# Altium PCB srf05.PcbDoc
Units mil, origin at the board's own origin, x right, y up, seen from the top; angles counter-clockwise.
Board outline 1200 x 760 mil, 2 copper layers (Top Layer, Bottom Layer); 2 components, 0 nets, 19 pads, 0 vias.
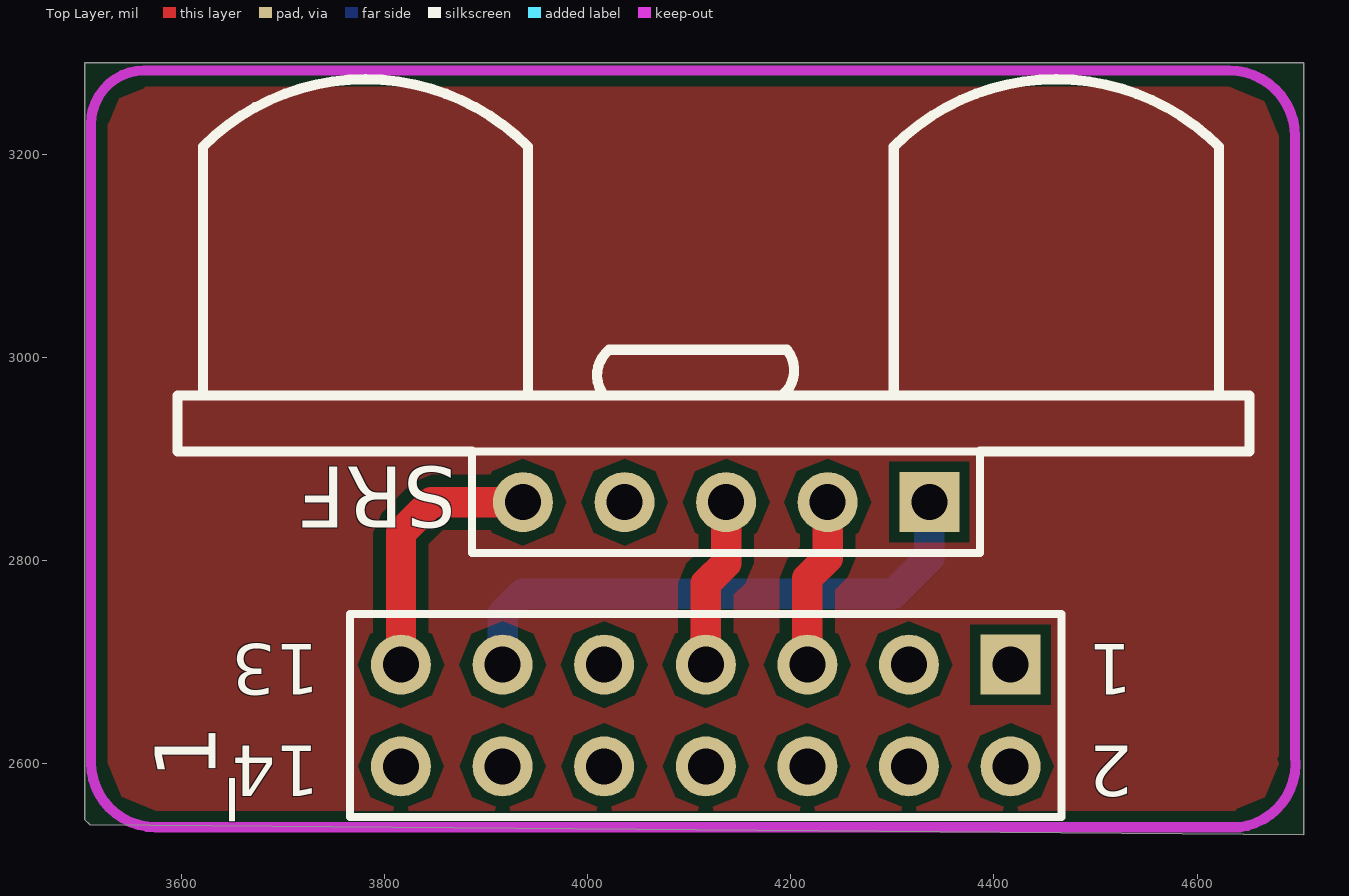
[diagram p0: Top Layer view]
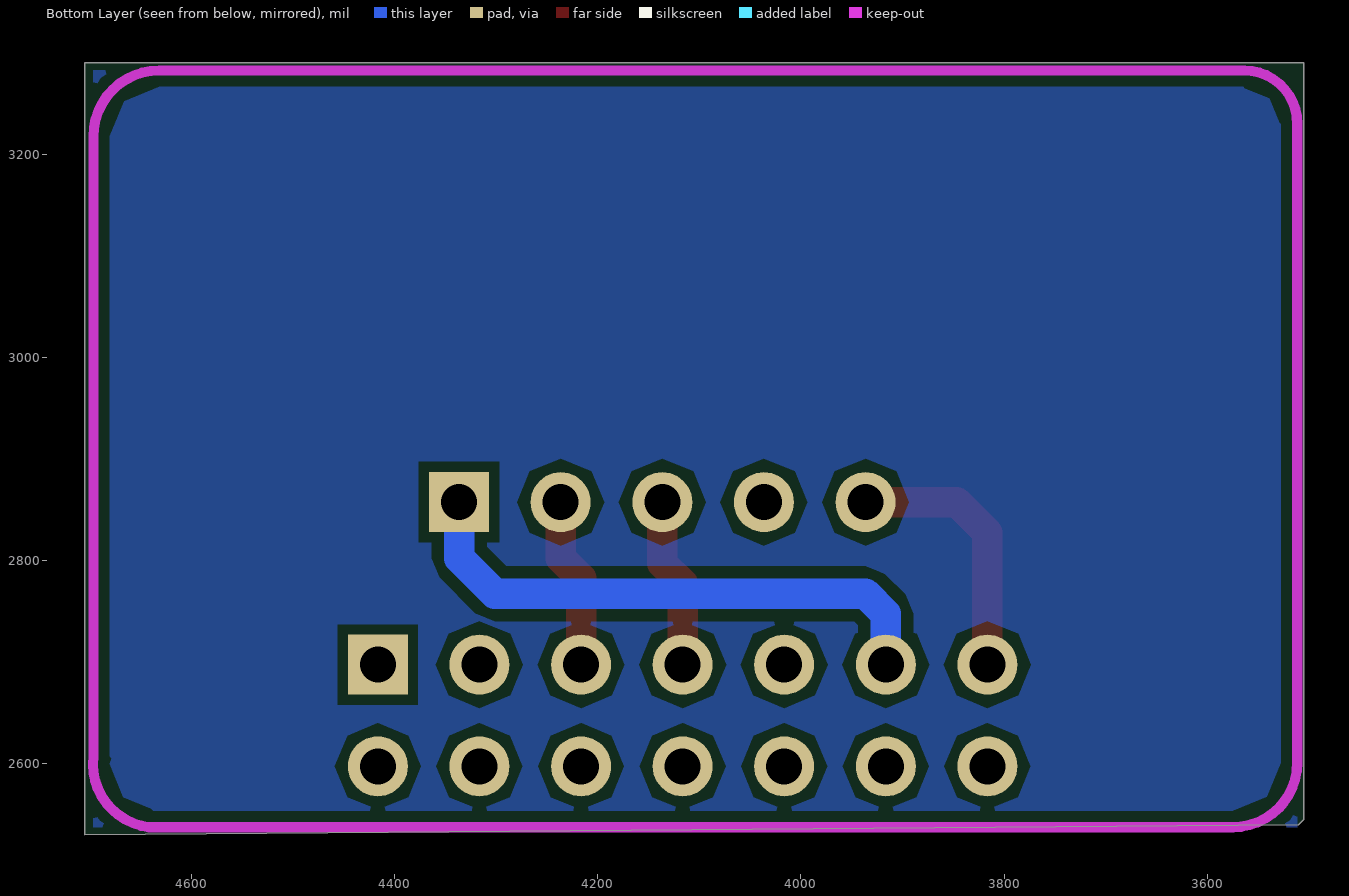
[diagram p1: Bottom Layer view, seen from below]

## Layer stack, top to bottom
Top Layer: signal copper 1.4
Dielectric: dielectric 12.6, FR-4, Dk 4.8
Bottom Layer: signal copper 1.4

## Board outline
3510,2540 3505,2545 3505,3290 4705,3290 4705,3200 4705,2530

## Design rules (kind name [scope] priority, off if disabled: settings)
Clearance [All] p1: gap=10
PolygonConnect [All] p1: connectstyle=Relief reliefconductorwidth=10 reliefentries=4 polygonreliefangle="90 Angle"
RoutingVias [All] p1: holewidth=28 width=50 viastyle="Through Hole" minholewidth=28 minwidth=50 maxholewidth=28 maxwidth=50
SilkscreenOverComponentPads [All] p1: minsilkscreentomaskgap=10
SolderMaskExpansion [All] p1: expansion=4
Width [All] p1: maxlimit=10 minlimit=10 preferedwidth=10
27 further rules are at their usual default settings.

## Components (designator, comment, footprint, x,y, rotation, side; value= is the part's Value field where it differs from the comment)
_1 "" HDR2X7 4416.4,2697.39 r180 top
SRF "" HDR1X5 4336.4,2857.39 r180 top

## Footprints (in the part's own frame and the unit in brackets; to place one, negate y for a bottom-side part, rotate by r counter-clockwise, add the part's x,y. Pads: shape width x height; smd on the part's side, far side on the other; paste and mask are expansions set on the pad)
HDR1X5 [mm] "Connector; Header; 5 Position"
  rect 1.5x1.5 hole 0.9: 1(0,0)
  round 1.5 hole 0.9: 2(2.54,0) 3(5.08,0) 4(7.62,0) 5(10.16,0)
  silkscreen extent -1.27,-1.27 11.43,1.27
HDR2X7 [mm] "Connector; Header; 7x2 Position"
  rect 1.5x1.5 hole 0.9: 1(0,0)
  round 1.5 hole 0.9: 2(0,2.54) 3(2.54,0) 4(2.54,2.54) 5(5.08,0) 6(5.08,2.54) 7(7.62,0) 8(7.62,2.54) 9(10.16,0) 10(10.16,2.54) 11(12.7,0) 12(12.7,2.54) 13(15.24,0) 14(15.24,2.54)
  silkscreen extent -1.27,-1.27 16.51,3.81

## Part data
_1: library part "Header 7X2", "Header, 7-Pin, Dual row"
SRF: library part "Header 5", "Header, 5-Pin"

## Nets (pads, with @x,y where several pads share a name; then routed paths per layer and width w, separated by ;. In a path a pad name is that pad's centre, name@x,y a point inside that pad or via, vN(x,y) a via of type N, cw(c..) or ccw(c..) an arc to the next point about the centre after c; other vN are vias at no path point)
pads on no net: _1.1 _1.2 _1.3 _1.4 _1.5 _1.6 _1.7 _1.8 _1.9 _1.10 _1.11 _1.12 _1.13 _1.14 SRF.1 SRF.2 SRF.3 SRF.4 SRF.5
copper on no net: | length 1146.8
  Top Layer w30: 3816.4,2697.39 3816.4,2827.39 3846.4,2857.39 3936.4,2857.39 ; 4116.4,2697.39 4116.4,2777.39 4136.4,2797.39 4136.4,2857.39 ; 4216.4,2697.39 4216.4,2782.39 4236.4,2802.39 4236.4,2857.39
  Bottom Layer w30: 3916.4,2697.39 3916.4,2747.39 3936.4,2767.39 4301.4,2767.39 4336.4,2802.39 4336.4,2857.39

## Polygon pours and split planes (outlines as drawn)
no net on Top Layer "Top Layer-No Net" (solid, pour order 1000): 4689.07,3279.8 3523.93,3279.8 3523.93,2537.39 4689.07,2537.39
no net on Bottom Layer "Top Layer-No Net" (solid, pour order 1002): 4696.4,2537.39 3511.4,2537.39 3511.4,3282.39 4696.4,3282.39

## Keep-outs
Keep-Out Layer:
  lines w10: 3511.4,2601 ccw(c3575.02,2601) 3575.02,2537.39 4641.4,2537.39 ccw(c4633.9,2599.89) 4696.4,2607.39 4696.4,3217.39 ccw(c4631.4,3217.39) 4631.4,3282.39 3563.63,3282.39 ccw(c3563.85,3229.93) 3511.4,3229.71 3511.4,2601

## Silkscreen, mask and mechanical layers (free items; w line width, h text height)
Top Overlay:
  lines w10: 3621.4,2962.39 3621.4,3207.39 cw(c3781.42,3047.37) 3941.43,3207.38 3941.43,2962.39 ; 3886.4,2907.39 3596.4,2907.39 3596.4,2962.39 4651.4,2962.39 4651.4,2907.39 4386.4,2907.39 ; 4016.4,2962.39 cw(c4041.4,2982.39) 4021.4,3007.38 4196.4,3007.39 cw(c4171.4,2987.39) 4191.4,2962.39 ; 4301.4,2962.39 4301.4,3207.39 cw(c4461.4,3047.39) 4621.4,3207.39 4621.4,2962.39

## Text inside footprints (layer, text, board x,y; h text height)
_1: Top Overlay "13" at 3736.4,2717.39 h50 r180; Top Overlay "14" at 3736.4,2617.39 h50 r180; Top Overlay "1" at 4536.4,2717.39 h50 r180; Top Overlay "2" at 4536.4,2617.39 h50 r180